# Altium PCB XMAS_2023_PCB.PcbDoc
Units mm, origin at the board's own origin, x right, y up, seen from the top; angles counter-clockwise.
Board outline 29.99 x 33 mm, 2 copper layers (Top Layer, Bottom Layer), stack 1.671 mm thick; 40 components, 21 nets, 120 pads, 38 vias.
Unrouted connection lines stored in the file: 3.
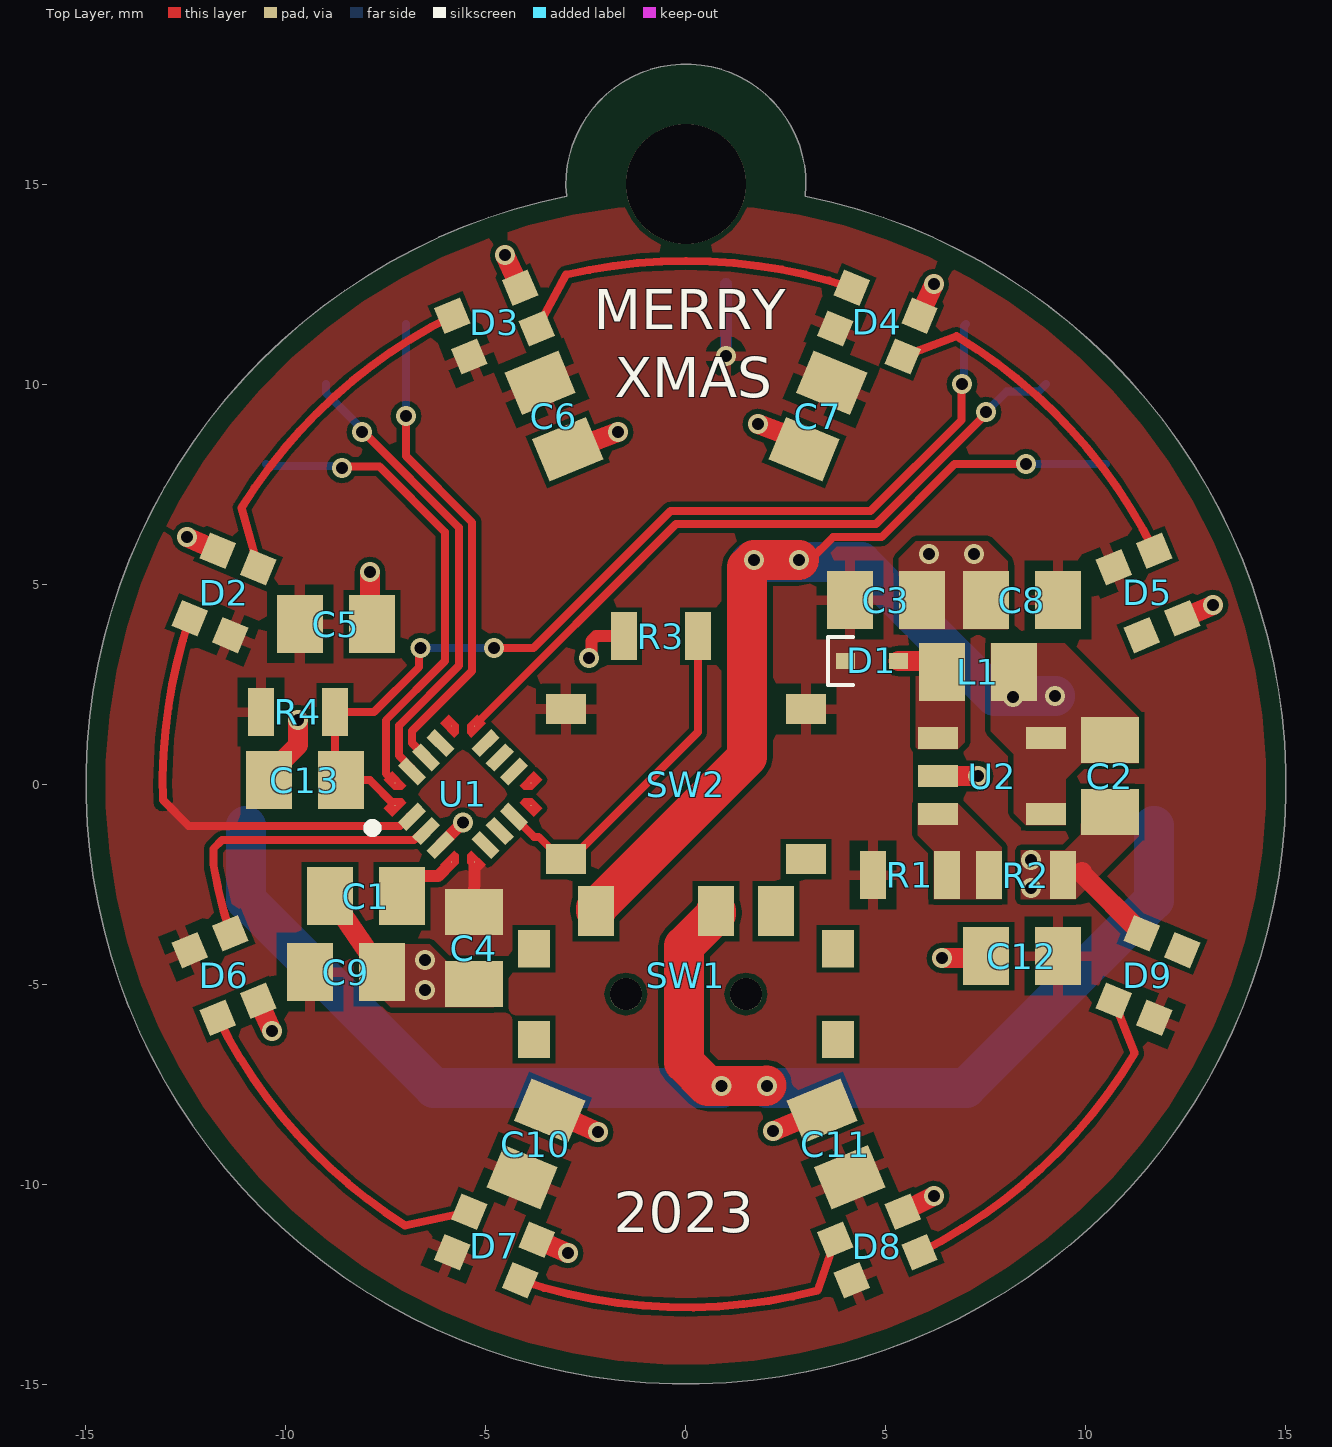
[diagram p0: Top Layer view]
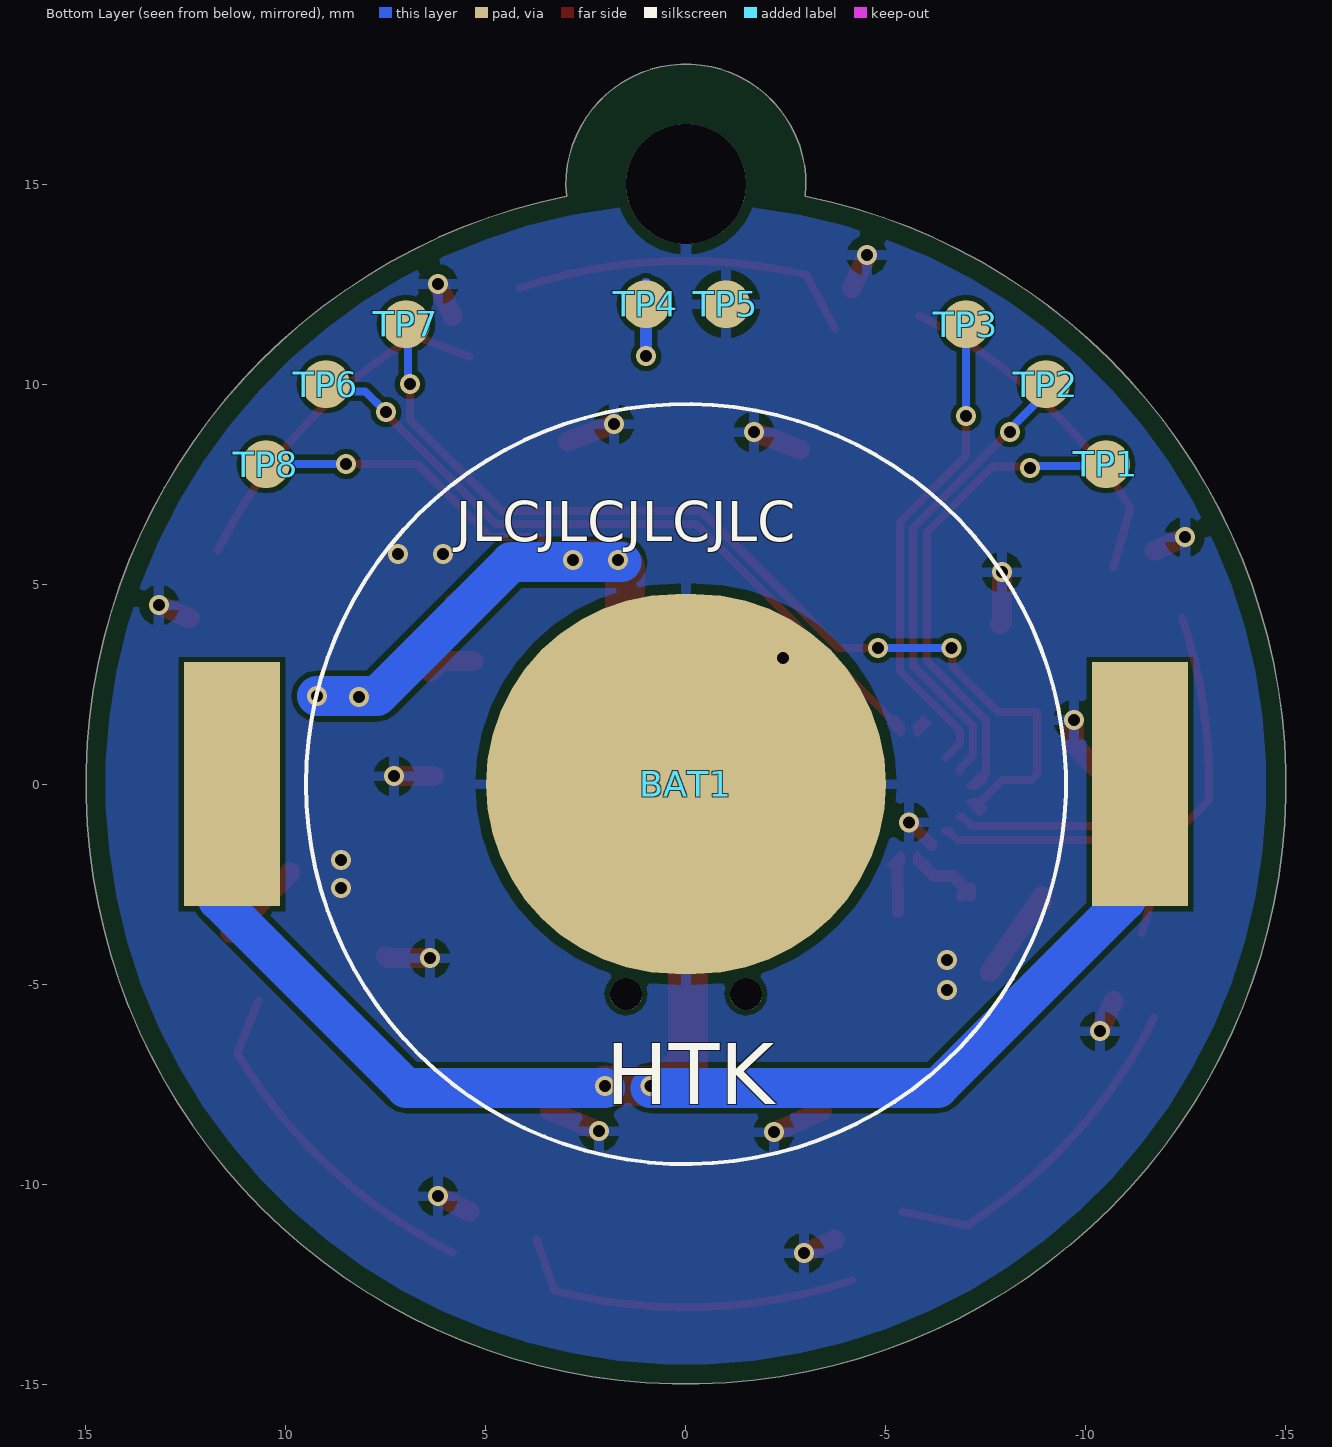
[diagram p1: Bottom Layer view, seen from below]

## Layer stack, top to bottom
Top Solder: solder mask 0.0102, Solder Resist, Dk 3.5
Top Layer: signal copper 0.0356
Dielectric 1: dielectric 1.6, FR-4, Dk 4.8
Bottom Layer: signal copper 0.0356
Bottom Solder: solder mask 0.0102, Solder Resist, Dk 3.5

## Board outline
-2.985,14.7 ccw(c0,0) 2.985,14.7 ccw(c0,15)

## Design rules (kind name [scope] priority, off if disabled: settings)
Clearance [All] p1: gap=0.127 ignorepadtopadclearanceinfootprint=FALSE
HoleSize [All] p1: absolutevalues=TRUE maxlimit=5 minlimit=0.025 maxpercent=80.000 minpercent=20.000
MinimumSolderMaskSliver [All] p1: minsoldermaskwidth=0.1
PolygonConnect [All] p1: connectstyle=Relief reliefconductorwidth=0.254 reliefentries=4 polygonreliefangle="90 Angle" airgapwidth=0.254
RoutingVias [All] p1: holewidth=0.3 width=0.5 viastyle="Through Hole" minholewidth=0.3 minwidth=0.5 maxholewidth=0.5 maxwidth=1
SilkToSolderMaskClearance [IsPad] p1: minsilkscreentomaskgap=0.1 clearancetoexposedcopper=TRUE
SolderMaskExpansion [All] p1: expansion=0.05
Width [All] p1: maxlimit=1 minlimit=0.2 preferedwidth=0.2
27 further rules are at their usual default settings.

## Components (designator, comment, footprint, x,y, rotation, side; value= is the part's Value field where it differs from the comment)
BAT1 "CR2032" BAT_2032 0,0 r180 bottom
C1 "1uF" CAP_0805_NOM -8,-2.8 r0 top
C2 "10uF" CAP_0805_NOM 10.6,0.2 r90 top
C3 "10uF" CAP_0805_NOM 5,4.6 r180 top
C4 "100nF" CAP_0805_NOM -5.3,-4.1 r90 top
C5 "10uF" CAP_0805_NOM -8.75,4 r180 top
C6 "100nF" CAP_0805_NOM -3.3,9.2 r112.5 top
C7 "100nF" CAP_0805_NOM 3.3,9.2 r67.5 top
C8 "100nF" CAP_0805_NOM 8.4,4.6 r0 top
C9 "100nF" CAP_0805_NOM -8.5,-4.7 r180 top
C10 "100nF" CAP_0805_NOM -3.75,-9 r247.5 top
C11 "100nF" CAP_0805_NOM 3.75,-9 r292.5 top
C12 "100nF" CAP_0805_NOM 8.4,-4.3 r0 top
C13 "100nF" CAP_0805_NOM -9.525,0.1 r0 top
D1 "D_SCHOTTKY" SOD-523 4.65,3.08 r0 top
D2 "WS2812C" LED_RGB_WS2812C-2020 -11.549,4.783 r247.5 top
D3 "WS2812C" LED_RGB_WS2812C-2020 -4.783,11.549 r202.5 top
D4 "WS2812C" LED_RGB_WS2812C-2020 4.783,11.549 r157.5 top
D5 "WS2812C" LED_RGB_WS2812C-2020 11.549,4.783 r112.5 top
D6 "WS2812C" LED_RGB_WS2812C-2020 -11.549,-4.783 r112.5 top
D7 "WS2812C" LED_RGB_WS2812C-2020 -4.783,-11.549 r157.5 top
D8 "WS2812C" LED_RGB_WS2812C-2020 4.783,-11.549 r202.5 top
D9 "WS2812C" LED_RGB_WS2812C-2020 11.549,-4.783 r247.5 top
L1 "4.7uH" CAP_0805_NOM 7.3,2.8 r180 top
R1 "150k" RES_0805_nom 5.6,-2.275 r180 top
R2 "47k" RES_0805_nom 8.5,-2.275 r180 top
R3 "10K" RES_0805_nom -0.625,3.7 r0 top
R4 "10k" RES_0805_nom -9.7,1.8 r180 top
SW1 "SW_SLIDE_SPDT_MK-12C02-G025" SW_SLIDE_SPDT_MK-12C02-G025 1.5,-5.25 r180 top
SW2 "SW" SW_TACT_SPST_TS-1187A 0,0 r0 top
TP1 "UART_RX" testpoint -10.5,8 r180 bottom
TP2 "UART_TX" testpoint -9,10 r90 bottom
TP3 "UART_CK" testpoint -7,11.5 r90 bottom
TP4 "TESTPOINT" testpoint 1,12 r90 bottom
TP5 "TESTPOINT" testpoint -1,12 r90 bottom
TP6 "TESTPOINT" testpoint 9,10 r90 bottom
TP7 "TESTPOINT" testpoint 7,11.5 r90 bottom
TP8 "TESTPOINT" testpoint 10.5,8 r90 bottom
U1 "STM8S003F3" UFQFPN20 -5.575,-0.25 r45 top
U2 "MT3540" "SOT-23 - 5" 6.304,0.2 r270 top

## Footprints (in the part's own frame and the unit in brackets; to place one, negate y for a bottom-side part, rotate by r counter-clockwise, add the part's x,y. Pads: shape width x height; smd on the part's side, far side on the other; paste and mask are expansions set on the pad)
BAT_2032 [mm] "MY-2032-12 2032 battery holder"
  rect 2.4x6.1 smd: 1(-11.35,0) 1(11.35,0)
  oval 10x9.5 smd: 2(0,0)
  body extent -11.63,-7.41 11.63,7.65, height 3.67
CAP_0805_NOM [mm]
  rect 1.15x1.45 smd: 1(-0.9,0) 2(0.9,0)
  body extent -1,-0.63 1,0.62, height 1.22
LED_RGB_WS2812C-2020 [mm]
  rect 0.7x0.7 smd mask+0.05: 1(-0.915,0.55) 2(-0.915,-0.55) 3(0.915,-0.55) 4(0.915,0.55)
  body extent -1.1,-1 1.1,1, height 0.84
RES_0805_nom [mm]
  rect 0.65x1.2 smd: 1(-0.925,0) 2(0.925,0)
  body extent -1,-0.63 1,0.63, height 0.51
SOD-523 [mm]
  rect 0.48x0.4 smd mask+0.05: 1(-0.66,0) 2(0.66,0)
  silkscreen extent -1.1,-0.6 -0.48,0.6, body extent -0.85,-0.45 0.85,0.45, height 0.7
"SOT-23 - 5" [mm] "2"
  rect 0.55x1 smd: 1(-0.95,0) 2(0,0) 3(0.95,0) 4(-0.95,2.7) 5(0.95,2.7)
  body extent -1.5,-0.02 1.5,2.82, height 1.2
SW_SLIDE_SPDT_MK-12C02-G025 [mm]
  rect 0.9x1.25 smd: 1(3.75,-2.075) 2(0.75,-2.075) 3(-0.75,-2.075)
  rect 0.8x0.93 smd: ""(-2.3,-1.135) ""(-2.3,1.135) ""(5.3,-1.135) ""(5.3,1.135)
  round 0.8 hole 0.8 unplated: ""(0,0) ""(3,0)
  body extent -1.8,-1.35 4.8,2.85, height 1.4
SW_TACT_SPST_TS-1187A [mm] "TS-1187A-B-A-B"
  rect 1x0.75 smd: 1(-3,1.875) 1(3,1.875) 2(-3,-1.875) 2(3,-1.875)
  body extent -2.55,-2.55 2.55,2.55, height 1.4
testpoint [mm] "Reference point"
  round 1.2 smd paste-0.6: 1(0,0)
  body extent -0.6,-0.59 0.6,0.61, height 0.03
UFQFPN20 [mm]
  round 0.025 smd mask+0.05: 1(-1.4,1) 5(-1.4,-1) 6(-1,-1.4) 10(1,-1.4) 11(1.4,-1) 15(1.4,1) 16(1,1.4) 20(-1,1.4)
  rect 0.7x0.3 smd mask+0.05: 2(-1.3,0.5) 3(-1.3,0) 4(-1.3,-0.5) 12(1.3,-0.5) 13(1.3,0) 14(1.3,0.5)
  rect 0.3x0.7 smd mask+0.05: 7(-0.5,-1.3) 8(0,-1.3) 9(0.5,-1.3) 17(0.5,1.3) 18(0,1.3) 19(-0.5,1.3)
  Top Layer region: -1.15,1.3 -1,1.15 -0.85,1.15 -0.85,1.65 -1.15,1.65
  Top Layer region: -1.15,1 -1.15,0.85 -1.65,0.85 -1.65,1.15 -1.3,1.15
  Top Layer region: -1.3,-1.15 -1.15,-1 -1.15,-0.85 -1.65,-0.85 -1.65,-1.15
  Top Layer region: -0.85,-1.65 -1.15,-1.65 -1.15,-1.3 -1,-1.15 -0.85,-1.15
  Top Layer region: 1.15,-1.65 0.85,-1.65 0.85,-1.15 1,-1.15 1.15,-1.3
  Top Layer region: 1.65,-0.85 1.65,-1.15 1.3,-1.15 1.15,-1 1.15,-0.85
  Top Layer region: 1.65,1.15 1.65,0.85 1.15,0.85 1.15,1 1.3,1.15
  Top Layer region: 1,1.15 0.85,1.15 0.85,1.65 1.15,1.65 1.15,1.3
  silkscreen extent -2.3,0.9 -2.1,1.1, body extent -1.5,-1.5 1.5,1.5, height 0.53

## Part data
BAT1: library part BAT_CR2032, JLCPCB Part Number=C964833, Manufacturer=MYOUNG, Manufacturer Part Number=MY-2032-12
C1 C2 C3 C4 C5 C6 C7 C8 C9 C10 C11 C12 C13: library part CAP_0805_10V
D1: "30V 500mV@200mA 200mA SOD-523 Schottky Barrier Diodes (SBD) ROHS", JLCPCB Part Number=C145179, Manufacturer=onsemi, Manufacturer Part Number=RB521S30T1G
D2 D3 D4 D5 D6 D7 D8 D9: library part LED_RGB_WS2812C-2020, "RGB SMD,2x2mm Light Emitting Diodes (LED) ROHS", JLCPCB Part Number=C2976072, Manufacturer=Worldsemi, Manufacturer Part Number=WS2812C-2020-V1
L1: library part IND_4.7uH_0805, "350mA 4.7uH ±20% 400mO 0805 Inductors (SMD) ROHS", JLCPCB Part Number=C139243, Manufacturer="FH (Guangdong Fenghua Advanced Tech)", Manufacturer Part Number=CMP201209UD4R7MT
R1 R2 R3 R4: library part RES_0805
SW1: JLCPCB Part Number=C778186, Manufacturer=G-Switch, Manufacturer Part Number=MK-12C02-G025
SW2: library part SW_SPST_TACT_TS_1187A, "No NO 50mA 100000 Times 160gf 12V Brick nogging SPST SMD Tactile Switches ROHS", JLCPCB Part Number=C318884, Manufacturer="XKB Connectivity", Manufacturer Part Number=TS-1187A-B-A-B
TP1 TP2 TP3: library part TESTPOINT, "1.2mm Test point"
TP4 TP5 TP6 TP7 TP8: "1.2mm Test point"
U1: "8KB 2.95V~5.5V STM8 1KB 16MHz FLASH 16 UFQFPN-20(3x3) Microcontroller Units (MCUs/MPUs/SOCs) ROHS", JLCPCB Part Number=C35556, Manufacturer=STMicroelectronics, Manufacturer Part Number=STM8S003F3U6TR
U2: library part IC_BOOST_MT3540, "boost converterType 28V 2.5V~5.5V 1.5A SOT-23-5 DC-DC Converters ROHS", JLCPCB Part Number=C181744, Manufacturer="XI'AN Aerosemi Tech", Manufacturer Part Number=MT3540

## Free pads (board coordinates)
  round 3 hole 3: 24(0,15)

## Via types
v1: diameter 0.5, hole 0.3, Top Layer to Bottom Layer, tented both sides, 38 vias

## Nets (pads, with @x,y where several pads share a name; then routed paths per layer and width w, separated by ;. In a path a pad name is that pad's centre, name@x,y a point inside that pad or via, vN(x,y) a via of type N, cw(c..) or ccw(c..) an arc to the next point about the centre after c; other vN are vias at no path point)
5V: C3.2 C4.2 C5.2 C6.2 C7.2 C8.2 C9.2 C10.2 C11.2 C12.2 D1.1 D2.4 D3.4 D4.4 D5.4 D6.4 D7.4 D8.4 D9.4 R1.2 R4.2 SW2.1 TP4.1 U1.6 | length 3.1
  Top Layer w0.3: C4.2 U1.6
  Bottom Layer w0.3: v1(1,10.7) TP4.1@1,12.5
BUT: R3.2 SW2.2 U1.9 | length 8.4
  Top Layer w0.2: U1.9 -3.8,-1.318 -3.682,-1.318 -3.125,-1.875 SW2.2@-3,-1.875 ; SW2.2@-2.977,-1.898 SW2.2@-3,-1.875 ; R3.2@0.275,3.275 0.3,3.25 0.3,1.3 -2.875,-1.875 SW2.2@-3,-1.875
GND: BAT1.2 C1.1 C2.1 C3.1 C4.1 C5.1 C6.1 C7.1 C8.1 C9.1 C10.1 C11.1 C12.1 C13.1 D2.2 D3.2 D4.2 D5.2 D6.2 D7.2 D8.2 D9.2 pad.24 R2.1 R3.1 TP5.1 U1.4 U2.2 | length 23.3
  Top Layer w0.2: C3.1@5.773,4.727 C3.1
  Top Layer w0.3: U1.4 v1(-5.575,-0.957) v1@-5.575,-0.95 ; v1(-2.425,3.15) -2.368,3.207 -2.368,3.582 -2.25,3.7 R3.1
  Top Layer w0.5: v1(-12.475,6.175) D2.2 ; D6.2 v1(-10.35,-6.175) ; C13.1 -10.425,0.25 -9.7,0.975 v1(-9.7,1.6) ; C1.1@-8.9,-2.95 C1.1 C9.1 ; v1(-7.9,5.3) -7.9,4.05 C5.1 ; v1(-4.525,13.225) D3.2 ; D7.2 v1(-2.95,-11.725) ; C10.1 v1(-2.2,-8.7) ; C6.1@-2.856,8.369 v1(-1.7,8.8) ; v1(1.8,9) C7.1@2.956,8.569 ; v1(2.175,-8.675) C11.1 ; D8.2 v1(6.2,-10.3) ; D4.2 v1(6.2,12.5) ; U2.2 v1(7.3,0.2) ; v1(6.4,-4.35) 7.45,-4.35 C12.1 ; 9.9,-2.2 9.9,-2.236 D9.2 ; D5.2 v1(13.175,4.475)
  other v1: -6.525,-5.15 -6.525,-4.4 8.625,-2.6 8.625,-1.9 6.075,5.75 7.2,5.75
NetBAT1_1: BAT1.1 SW1.2 | length 35.6
  Top Layer w1: SW1.2 0.75,-3.25 -0.05,-4.05 -0.05,-6.957 0.536,-7.543 v1(0.886,-7.543) 2.001,-7.543 v1@2.013,-7.531
  Bottom Layer w1: BAT1.1@-11,-1.043 -11,-2.893 -6.3,-7.593 v1@0.886,-7.593 ; v1@2.025,-7.593 7,-7.593 11.7,-2.893 BAT1.1@11.7,-1.043
  other v1: 2.025,-7.543
NetC1_2: C1.2 U1.5 | length 1.9
  Top Layer w0.3: C1.2 -7.1,-2.725 -6.675,-2.3 -6.2,-2.3 U1.5 ; C1.2@-7.1,-2.6 -7.037,-2.662 -7,-2.7 C1.2@-6.9,-2.8
NetD1_2: D1.2 L1.2 U2.1 | length 1.2
  Top Layer w0.5: D1.2 6.12,3.08 L1.2
NetD2_1: D2.1 D3.3 | length 8.8
  Top Layer w0.2: D2.1 -11.11,6.906 cw(c0,0) D3.3
NetD3_1: D3.1 D4.3 | length 8.8
  Top Layer w0.2: D3.1 -2.996,12.734 cw(c0,0) D4.3
NetD4_1: D4.1 D5.3 | length 8.8
  Top Layer w0.2: D4.1 6.76,11.2 cw(c0,0) D5.3
NetD6_1: D6.1 D7.3 | length 8.7
  Top Layer w0.2: D6.1 ccw(c0,0) -7.023,-11.037 D7.3
NetD7_1: D7.1 D8.3 | length 8.9
  Top Layer w0.2: D7.1 ccw(c0,0) 3.292,-12.661 D8.3
NetD8_1: D8.1 D9.3 | length 8.8
  Top Layer w0.2: D8.1 ccw(c0,0) 11.218,-6.731 D9.3
NetR1_1: R1.1 R2.2 U2.3
NRST: C13.2 R4.1 TP7.1 U1.1 | length 24.8
  Top Layer w0.2: U1.1 -7.905,0.1 C13.2 -8.775,0.25 R4.1 -7.8,1.8 -6.669,2.931 -6.669,3.369 v1(-6.637,3.4) v1@-6.775,3.4 ; v1(-4.8,3.4) -3.812,3.4 -0.385,6.827 4.615,6.827 6.894,9.106 6.894,9.994 v1(6.9,10)
  Bottom Layer w0.2: v1@-6.5,3.4 v1(-4.8,3.4) ; v1(6.9,10) 6.95,10.05 6.95,11.45 TP7.1
STR_B: D6.3 U1.3 | length 7.7
  Top Layer w0.2: D6.3 cw(c0,0) -11.817,-2.003 -11.817,-1.617 -11.6,-1.4 -6.796,-1.4 -6.565,-1.169 U1.3
STR_T: D2.3 U1.2 | length 11.2
  Top Layer w0.2: D2.3 ccw(c0,0) -13.076,-0.4 -12.434,-1.043 -7.146,-1.043 -6.919,-0.816 U1.2
SWIM: TP6.1 U1.15 | length 17.9
  Top Layer w0.2: U1.15 -5.292,1.458 -0.25,6.5 4.75,6.5 7.5,9.25 v1(7.5,9.3)
  Bottom Layer w0.2: v1(7.5,9.3) 8.019,9.819 8.819,9.819 TP6.1
UART_CK: TP3.1 U1.18 | length 12.3
  Top Layer w0.2: v1(-7,9.2) -7,8.2 -5.346,6.546 -5.346,2.829 -6.85,1.325 -6.85,1.025 U1.18
  Bottom Layer w0.2: v1(-7,9.2) TP3.1
UART_RX: TP1.1 U1.20 | length 12.2
  Top Layer w0.2: v1(-8.6,7.9) -8.562,7.938 -7.662,7.938 -6.023,6.298 -6.023,3.077 -7.504,1.596 -7.504,0.265 U1.20
  Bottom Layer w0.2: TP1.1 -10.45,7.95 -8.65,7.95 v1(-8.6,7.9)
UART_TX: TP2.1 U1.19 | length 11.8
  Top Layer w0.2: v1(-8.1,8.8) -8.062,8.8 -5.673,6.411 -5.673,2.964 -7.177,1.46 -7.177,0.716 -6.848,0.386 U1.19
  Bottom Layer w0.2: TP2.1 -9,9.781 -8.1,8.881 v1(-8.1,8.8)
VBAT: C2.2 L1.1 SW1.1 TP8.1 U2.4 U2.5 | length 29.2
  Top Layer w0.2: v1(2.825,5.6) 3.1,5.6 3.673,6.173 4.885,6.173 6.712,8 v1(8.5,8)
  Top Layer w1: SW1.1 -2.25,-3.1 1.525,0.675 1.525,5.425 v1(1.7,5.6) v1(2.825,5.6)
  Bottom Layer w0.2: v1(8.5,8) TP8.1
  Bottom Layer w1: v1@1.613,5.55 4.375,5.55 7.725,2.2 v1(9.225,2.2)
  other v1: 8.175,2.175
pads on no net: D5.1 D9.1 SW1. SW1.3 U1.7 U1.8 U1.10 U1.11 U1.12 U1.13 U1.14 U1.16 U1.17

## Polygon pours and split planes (outlines as drawn)
5V on Top Layer "5V_L01_P008" (solid, pour order 8): -14.5,0 ccw(c0,0) 0,-14.5 ccw(c0,0) 14.5,0 ccw(c0,0) 0,14.5 ccw(c0,0)
NetD1_2 on Top Layer "Top Layer-NetD1_2" (solid, pour order 1): 5.75,3.525 6.975,3.525 6.975,1.05 6.8,0.875 5.8,0.875 5.75,0.925
GND on Top Layer "Top Layer-GND" (solid, pour order 7): -6.4,-4 -5.975,-4.425 -4.8,-4.425 -4.8,-5.575 -7.375,-5.575 -7.65,-5.3 -7.65,-4
GND on Top Layer "Top Layer-GND 1" (solid, pour order 6): 5.35,3.875 8.05,3.875 8.05,5.575 7.55,6.075 5.75,6.075 5.325,5.65
GND on Top Layer "GND_L01_P005" (solid, pour order 5): 9.9,-0.15 9.925,-0.125 11.225,-0.125 11.325,-0.225 11.325,-1.3 9.75,-2.875 8.375,-2.875 8.375,-1.65 9.475,-1.65 9.875,-1.25
VBAT on Top Layer "Top Layer-VBAT" (solid, pour order 4): 7.625,3.525 7.625,1.325 8.2,0.75 8.2,-0.725 8.5,-1.025 9.5,-1.025 9.5,0.125 9.9,0.525 11.325,0.525 11.325,1.675 9.475,3.525 8.775,3.525
NetR1_1 on Top Layer "NETR1_1_L01_P002" (solid, pour order 2): 5.8,-0.475 5.8,-1.275 6.2,-1.675 6.2,-2.875 7.9,-2.875 7.9,-1.575 6.8,-0.475
GND on Bottom Layer "GND_L02_P000" (solid, pour order 0): -14.5,0 ccw(c0,0) 0,-14.5 ccw(c0,0) 14.5,0 ccw(c0,0) 0,14.5 ccw(c0,0)

## Silkscreen, mask and mechanical layers (free items; w line width, h text height)
Top Overlay:
  text "MERRY" at -2.3,11.375 h1
  text "XMAS" at -1.775,9.675 h1
  text "2023" at -1.8,-11.2 h1
Bottom Overlay:
  circle w0.1: c0,0 r9.5
  text "JLCJLCJLCJLC" at 5.75,6.075 h1
  text "HTK" at 2,-8 h1.52
Board Outline:
  the board outline again, w0.001